# Altium PCB UI_Panel.PcbDoc
Units mil, origin at the board's own origin, x right, y up, seen from the top; angles counter-clockwise.
Board outline 3759 x 3274 mil, 3 copper layers (TopLayer, MidLayer14, BottomLayer); 16 components, 1 nets, 131 pads, 11 vias.
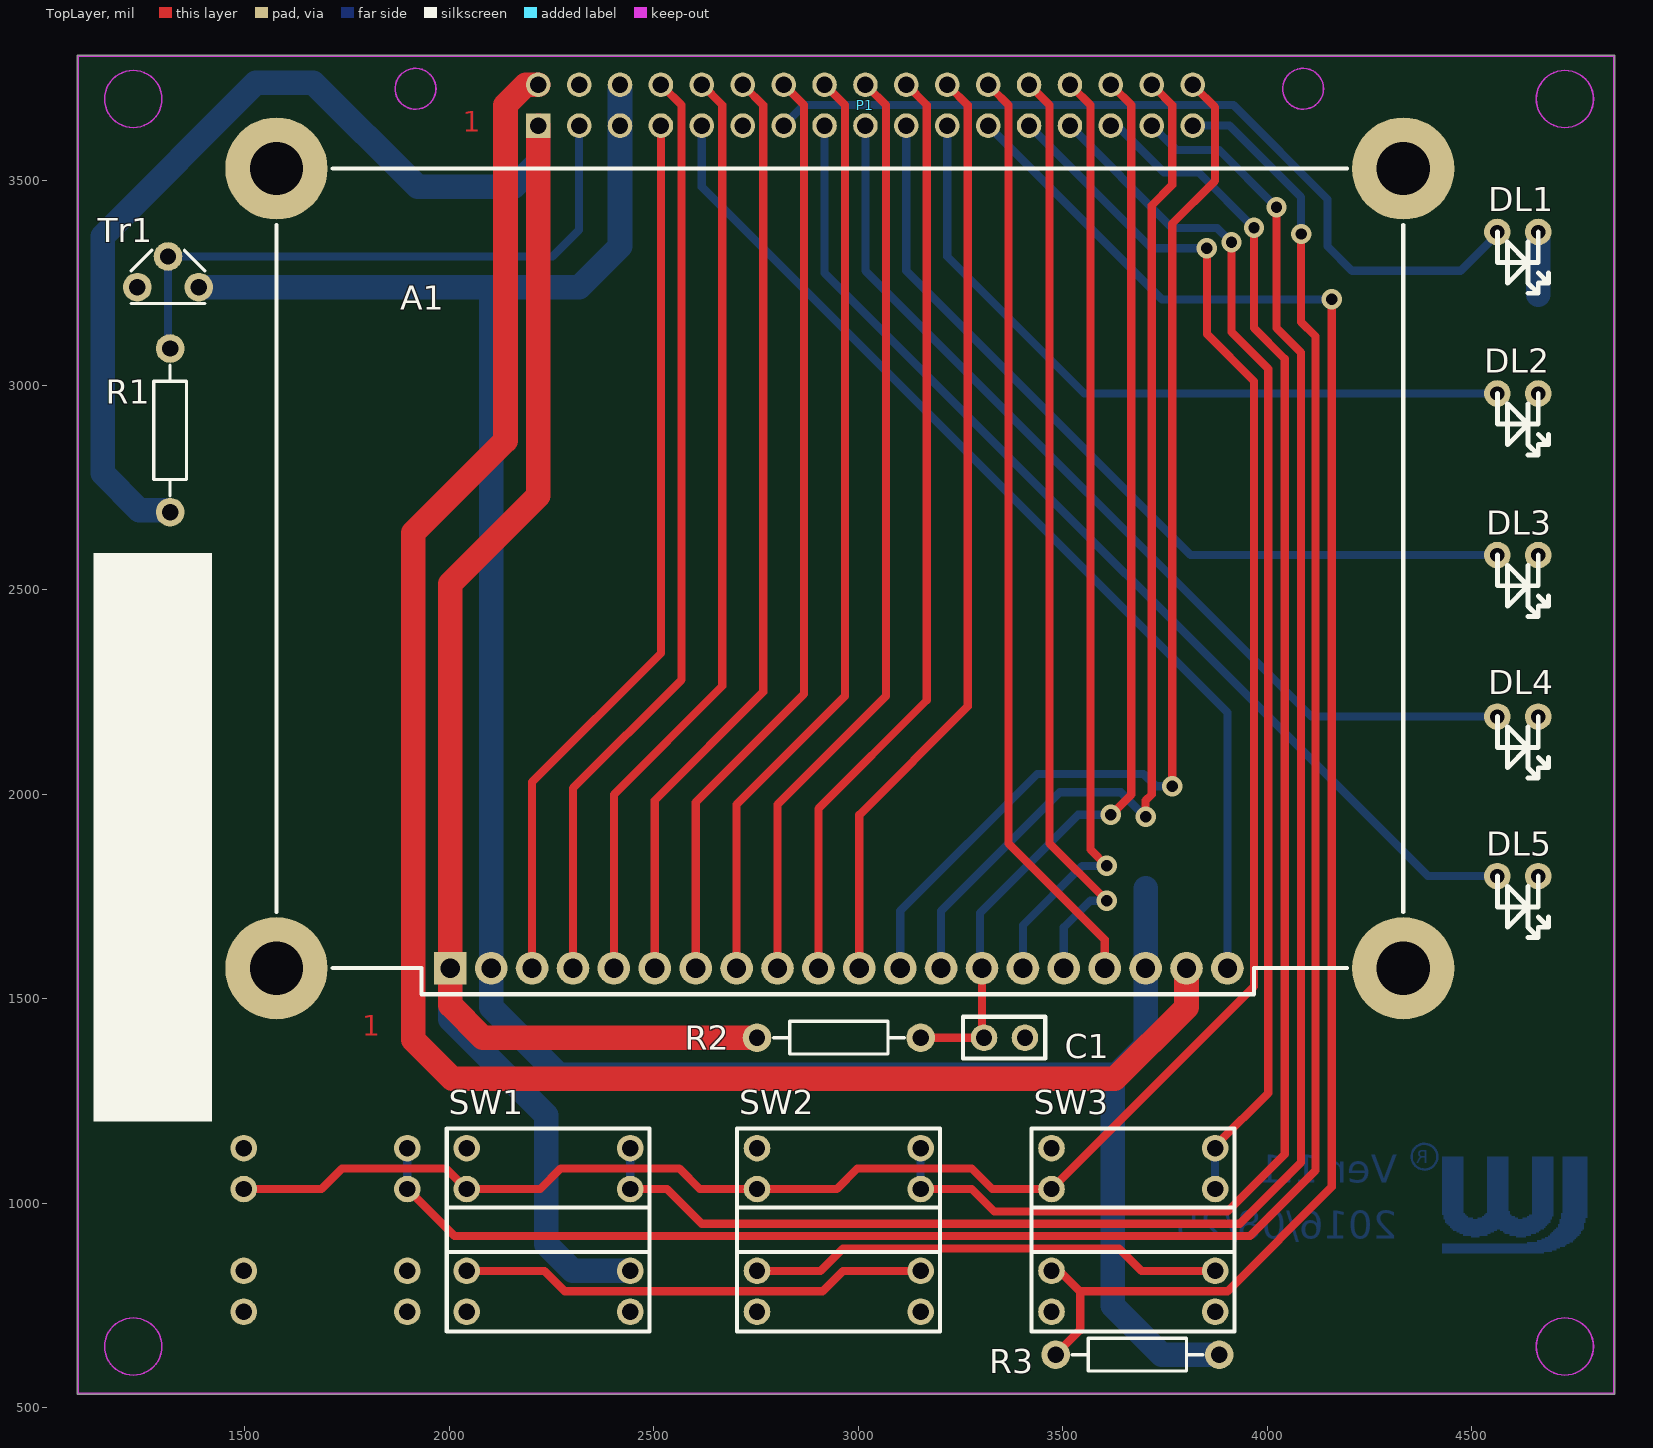
[diagram p0: TopLayer view]
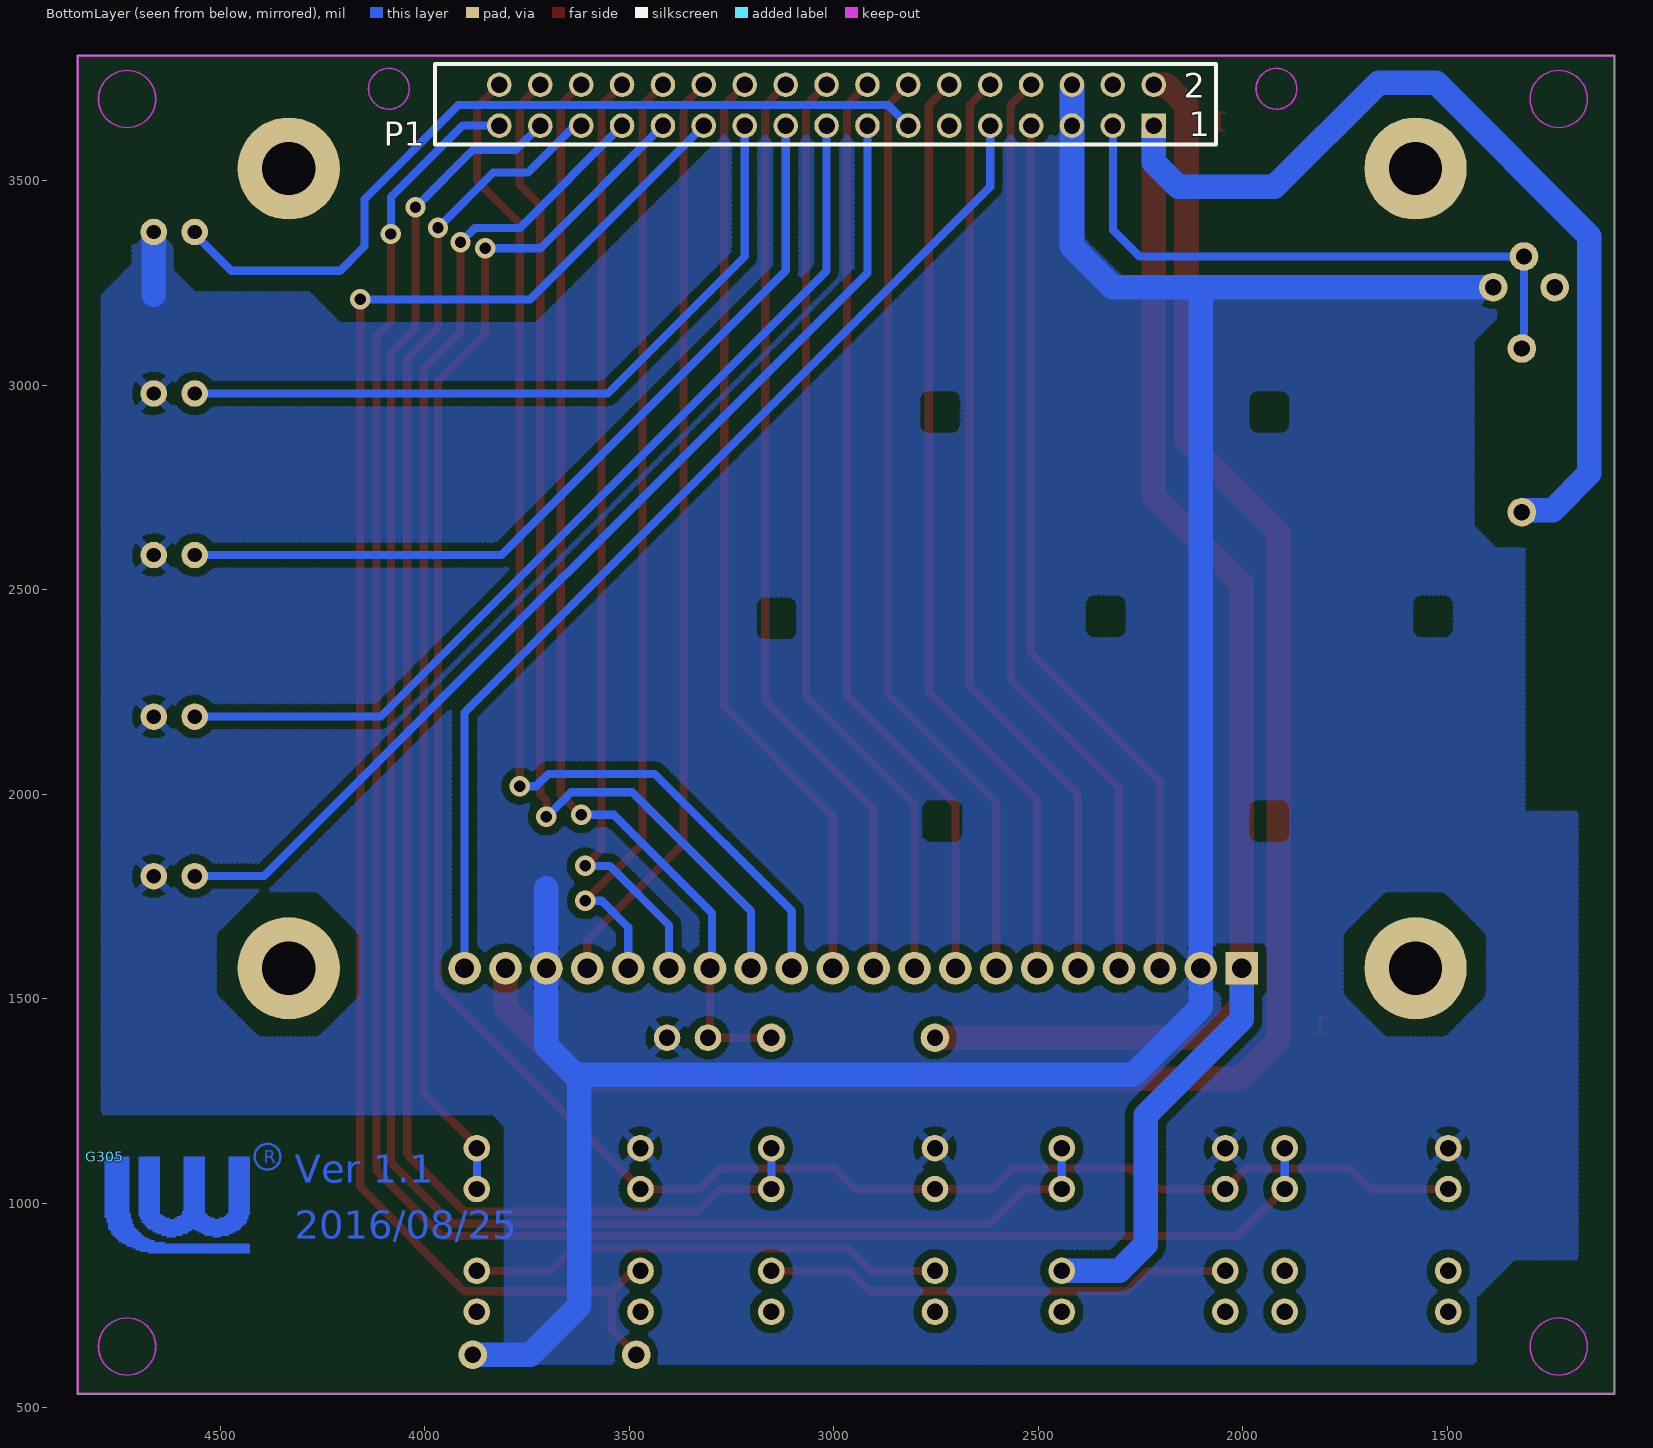
[diagram p1: BottomLayer view, seen from below]
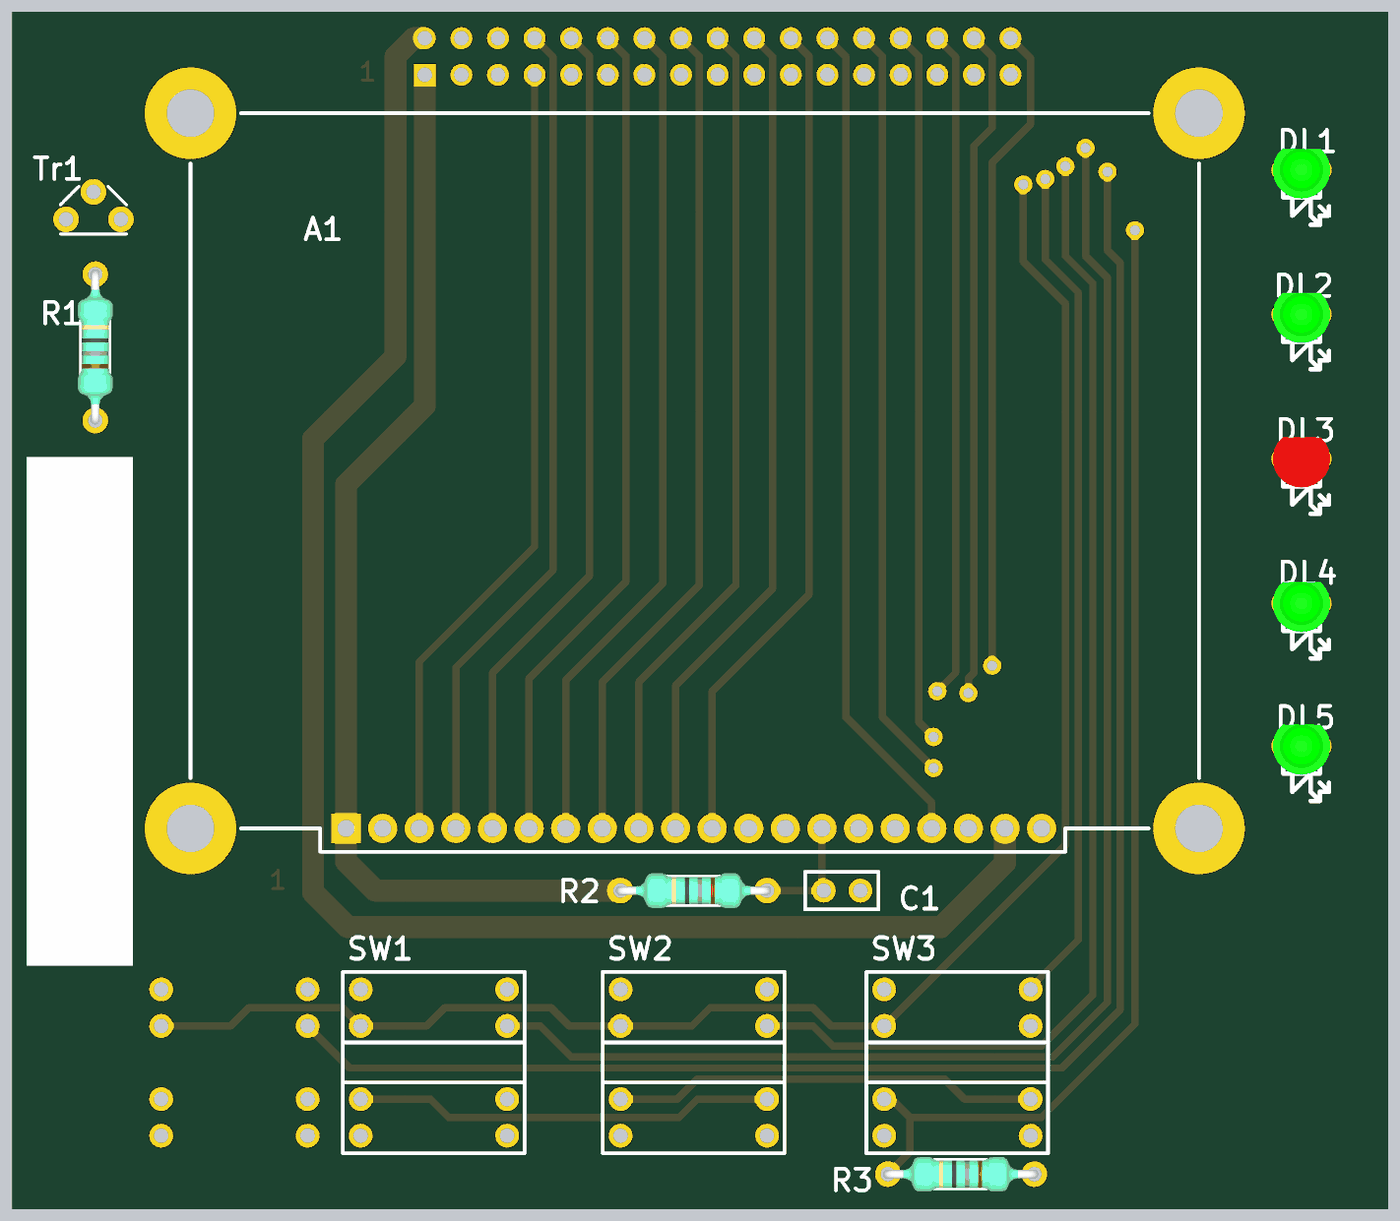
[diagram p2: 3D render of the assembled board from above, using the file's embedded part models]

## Layer stack, top to bottom
TopLayer: signal copper 1.4
Dielectric: dielectric 12.6, FR-4, Dk 4.8
MidLayer14: signal copper 1.4
Dielectric: dielectric 12.6, FR-4, Dk 4.8
BottomLayer: signal copper 1.4

## Board outline
1090.3,532.79 4849.3,532.79 4849.3,3806.79 1090.3,3806.79

## Design rules (kind name [scope] priority, off if disabled: settings)
Clearance [All] p1 off: gap=20
ComponentClearance [All] p1 off: gap=10 collisioncheckmode=3 verticalgap=10 showdistances=FALSE
FabricationTestPointUsage TestPointUsage [All] p1: valid=0 allowmultiple=FALSE
FabricationTestpoint Testpoint [All] p1: side=3 testpointundercomponent=TRUE minsize=40 maxsize=100 preferedsize=60 minholesize=20 maxholesize=40 preferedholesize=32 testpointgrid=1 allowsidetop=TRUE allowsidebottom=TRUE usegrid=TRUE gridtolerance=0.01
PlaneClearance [All] p1: clearance=10
PolygonConnect [All] p1: connectstyle=Relief reliefconductorwidth=20 reliefentries=4 polygonreliefangle="45 Angle" airgapwidth=10
RoutingLayers [All] p1: top layer_v5=TRUE mid layer 14_v5=FALSE bottom layer_v5=TRUE
RoutingPriority [All] p1: routingpriority=2
RoutingVias [All] p1: holewidth=20 width=50 viastyle="Through Hole" minholewidth=28 minwidth=50 maxholewidth=28 maxwidth=50
SolderMaskExpansion [All] p1: expansion=2
Width [All] p1: maxlimit=10 minlimit=10 preferedwidth=10
22 further rules are at their usual default settings.

## Components (designator, comment, footprint, x,y, rotation, side; value= is the part's Value field where it differs from the comment)
A1 "Comment" TPIH2500-LCD 2002.3,1574.79 r0 top
C1 "Comment" RAD0.1 3307.3,1404.79 r0 top
DL1 "Comment" LED_GREEN 4662.3,3374.79 r180 top
DL2 "Comment" LED_GREEN 4662.3,2979.79 r180 top
DL3 "Comment" LED_RED 4662.3,2584.79 r180 top
DL4 "Comment" LED_GREEN 4662.3,2189.79 r180 top
DL5 "Comment" LED_GREEN 4662.3,1799.79 r180 top
G305 "Comment" LW_R-top 4781.61,1113.94 r180 bottom
P1 "Comment" TPIH2500-IDC2.54 2217.3,3634.79 r0 top
R1 "Comment" TPIH2500-RES0.4 1317.3,3089.79 r270 top
R2 "Comment" TPIH2500-RES0.4 2752.3,1404.79 r0 top
R3 "Comment" TPIH2500-RES0.4 3482.3,629.79 r0 top
SW1 "Comment" SW-MEC8 2042.3,1134.79 r0 top
SW2 "Comment" SW-MEC8 2752.3,1134.79 r0 top
SW3 "Comment" SW-MEC8 3472.3,1134.79 r0 top
Tr1 "Comment" TO-92C 1312.3,3314.79 r90 top

## Footprints (in the part's own frame and the unit in brackets; to place one, negate y for a bottom-side part, rotate by r counter-clockwise, add the part's x,y. Pads: shape width x height; smd on the part's side, far side on the other; paste and mask are expansions set on the pad)
LED_GREEN [mil]
  round 65 hole 35: A(100,0) K(0,0)
  silkscreen extent -25,0 100,150, body extent -28,-59 128,79, height 271
LED_RED [mil]
  round 65 hole 35: A(100,0) K(0,0)
  silkscreen extent -25,0 100,150, body extent -28,-59 128,79, height 271
LW_R-top [mil]
  TopLayer circle w5.91: c397.58,0 r31.5
  TopLayer region: 59.06,-3.94 59.05,-7.87 59.05,-19.69 59.06,-23.62 59.05,-27.56 59.05,-39.37 59.06,-43.31 59.05,-47.24 59.05,-59.06 59.06,-62.99 59.05,-66.93 59.05,-78.74 59.06,-82.68 59.05,-86.61 59.05,-98.43 59.06,-102.36 59.05,-106.3 59.05,-133.86 59.06,-137.8 62.99,-137.8 62.99,-141.73 62.99,-153.54 66.93,-153.54 66.93,-165.35 70.87,-165.35 70.87,-173.23 74.8,-173.23 74.8,-177.17 78.74,-177.17 78.74,-181.1 82.68,-181.1 82.68,-185.04 86.61,-185.04 86.61,-188.98 90.55,-188.98 90.55,-192.91 94.49,-192.91 94.49,-196.85 102.36,-196.85 102.36,-200.79 110.24,-200.79 110.24,-204.72 122.05,-204.72 122.05,-208.66 145.67,-208.66 145.67,-212.6 354.33,-212.6 354.33,-220.47 354.33,-224.41 354.33,-228.35 354.33,-236.22 106.3,-236.22 106.3,-232.28 86.61,-232.28 86.61,-228.35 74.8,-228.35 74.8,-224.41 66.93,-224.41 66.93,-220.47 55.12,-220.47 55.12,-216.54 51.18,-216.54 51.18,-212.6 43.31,-212.6 43.31,-208.66 35.43,-208.66 35.43,-204.72 31.5,-204.72 31.5,-200.79 27.56,-200.79 27.56,-196.85 23.62,-196.85 23.62,-192.91 19.68,-192.91 19.68,-188.98 15.75,-188.98 15.75,-181.1 11.81,-181.1 11.81,-177.17 7.87,-177.17 7.87,-161.42 3.94,-161.42 3.94,-149.61 0,-149.61 0,0 59.05,0
  TopLayer region: 167 vertices and 0 holes, not listed, extent 82.68,-196.85 354.33,0
RAD0.1 [mil]
  round 65 hole 40: 1(0,0) 2(100,0)
  silkscreen extent -51,-51 150,51
SW-MEC8 [mil]
  round 65 hole 40: 1(0,0) 2(400,0) 3(0,-100) 4(400,-100) 5(0,-300) 6(400,-300) 7(0,-400) 8(400,-400)
  silkscreen extent -49,-448 448,48
TO-92C [mil]
  round 70 hole 40: 1(-75,75) 2(0,0) 3(-75,-75)
  silkscreen extent -115,-90 15,90
TPIH2500-IDC2.54 [mil]
  rect 60x60 hole 40: 1(0,0)
  round 60 hole 40: 2(0,100) 3(100,0) 4(100,100) 5(200,0) 6(200,100) 7(300,0) 8(300,100) 9(400,0) 10(400,100) 11(500,0) 12(500,100) 13(600,0) 14(600,100) 15(700,0) 16(700,100) 17(800,0) 18(800,100) 19(900,0) 20(900,100) 21(1000,0) 22(1000,100) 23(1100,0) 24(1100,100) 25(1200,0) 26(1200,100) 27(1300,0) 28(1300,100) 29(1400,0) 30(1400,100) 31(1500,0) 32(1500,100) 33(1600,0) 34(1600,100)
TPIH2500-LCD [mil]
  rect 80x80 hole 47: 1(0,0)
  round 80 hole 47: 2(100,0) 3(200,0) 4(300,0) 5(400,0) 6(500,0) 7(600,0) 8(700,0) 9(800,0) 10(900,0) 11(1000,0) 12(1100,0) 13(1200,0) 14(1300,0) 15(1400,0) 16(1500,0) 17(1600,0) 18(1700,0) 19(1800,0) 20(1900,0)
  silkscreen extent -425,-64 2330,1955
TPIH2500-RES0.4 [mil]
  round 70 hole 40: 1(0,0) 2(400,0)
  silkscreen extent 40,-40 360,40, body extent -13,-47 411,47, height 95

## Free pads (board coordinates)
  rect 80x80 hole 47: 1(2002.3,1574.79)
  round 80 hole 47: 35(3602.3,1574.79) 36(3702.3,1574.79) 37(3802.3,1574.79) 38(3902.3,1574.79) 39(3502.3,1574.79) 40(3402.3,1574.79) 41(3302.3,1574.79) 42(3202.3,1574.79) 43(2802.3,1574.79) 44(2902.3,1574.79) 45(3002.3,1574.79) 46(3102.3,1574.79) 47(2702.3,1574.79) 48(2602.3,1574.79) 49(2502.3,1574.79) 50(2402.3,1574.79) 51(2302.3,1574.79) 52(2202.3,1574.79) 53(2102.3,1574.79)
  round 65 hole 40: 90(1897.3,1134.79) 91(1897.3,1034.79) 92(1897.3,834.79) 93(1897.3,734.79) 94(1497.3,1134.79) 95(1497.3,1034.79) 96(1497.3,834.79) 97(1497.3,734.79)
  round 250 hole 130: 108(4332.3,3529.79) 109(4332.3,1574.79) 110(1577.3,3529.79) 111(1577.3,1574.79)

## Via types
v1: diameter 50, hole 28, TopLayer to BottomLayer, 11 vias

## Nets (pads, with @x,y where several pads share a name; then routed paths per layer and width w, separated by ;. In a path a pad name is that pad's centre, name@x,y a point inside that pad or via, vN(x,y) a via of type N, cw(c..) or ccw(c..) an arc to the next point about the centre after c; other vN are vias at no path point)
GND: pad.36 pad.53 pad.94 | length 6306.5
  BottomLayer w60: 1387.3,3239.79 2317.3,3239.79 2417.3,3339.79 2417.3,3729.79 ; 2102.3,3234.79 pad.53 2102.3,1479.79 2267.3,1314.79 3632.3,1314.79 3702.3,1384.79 3702.3,1769.79 ; 3622.3,1304.79 3622.3,749.79 3742.3,629.79 3872.3,629.79 ; 4662.3,3221.76 4662.3,3374.79
pads on no net: A1.1 A1.2 A1.3 A1.4 A1.5 A1.6 A1.7 A1.8 A1.9 A1.10 A1.11 A1.12 A1.13 A1.14 A1.15 A1.16 A1.17 A1.18 A1.19 A1.20 C1.1 C1.2 DL1.A DL1.K DL2.A DL2.K DL3.A DL3.K DL4.A DL4.K DL5.A DL5.K P1.1 P1.2 P1.3 P1.4 P1.5 P1.6 P1.7 P1.8 P1.9 P1.10 P1.11 P1.12 P1.13 P1.14 P1.15 P1.16 P1.17 P1.18 P1.19 P1.20 P1.21 P1.22 P1.23 P1.24 P1.25 P1.26 P1.27 P1.28 P1.29 P1.30 P1.31 P1.32 P1.33 P1.34 R1.1 R1.2 R2.1 R2.2 R3.1 R3.2 SW1.1 SW1.2 SW1.3 SW1.4 SW1.5 SW1.6 SW1.7 SW1.8 SW2.1 SW2.2 SW2.3 SW2.4 SW2.5 SW2.6 SW2.7 SW2.8 SW3.1 SW3.2 SW3.3 SW3.4 SW3.5 SW3.6 SW3.7 SW3.8 Tr1.1 Tr1.2 Tr1.3
copper on no net: | length 89198.1
  TopLayer w20: 1507.3,1034.79 1687.3,1034.79 1737.3,1084.79 1992.3,1084.79 2042.3,1034.79 2222.3,1034.79 2272.3,1084.79 2562.3,1084.79 2612.3,1034.79 2947.3,1034.79 2997.3,1084.79 3277.3,1084.79 3327.3,1034.79 3462.3,1034.79 ; 1897.3,1034.79 2012.3,919.79 3957.3,919.79 4117.3,1079.79 4117.3,3119.79 4082.3,3154.79 v1(4082.3,3369.79) ; 2052.3,834.79 2232.3,834.79 2282.3,784.79 2912.3,784.79 2962.3,834.79 3142.3,834.79 ; 2202.3,1584.79 2202.3,2029.79 2517.3,2344.79 2517.3,3629.79 ; 2302.3,1579.79 2302.3,2014.79 2567.3,2279.79 2567.3,3684.79 2522.3,3729.79 ; 2402.3,1579.79 2402.3,1999.79 2667.3,2264.79 2667.3,3684.79 2617.3,3734.79 ; 2447.3,1034.79 2532.3,1034.79 2617.3,949.79 3932.3,949.79 4082.3,1099.79 4082.3,3079.79 4022.3,3139.79 v1(4022.3,3434.79) ; 2502.3,1574.79 2502.3,1984.79 2767.3,2249.79 2767.3,3684.79 2722.3,3729.79 ; 2602.3,1584.79 2602.3,1979.79 2867.3,2244.79 2867.3,3684.79 2817.3,3734.79 ; 2702.3,1584.79 2702.3,1974.79 2967.3,2239.79 2967.3,3684.79 2917.3,3734.79 ; 2757.3,834.79 2907.3,834.79 2962.3,889.79 3637.3,889.79 3692.3,834.79 3872.3,834.79 ; 2802.3,1574.79 2802.3,1974.79 3067.3,2239.79 3067.3,3684.79 3022.3,3729.79 ; 2902.3,1579.79 2902.3,1964.79 3167.3,2229.79 3167.3,3684.79 3117.3,3734.79 ; 3002.3,1574.79 3002.3,1949.79 3267.3,2214.79 3267.3,3684.79 3222.3,3729.79 ; 3152.3,1404.79 3302.3,1404.79 3302.3,1579.79 ; 3162.3,1034.79 3277.3,1034.79 3332.3,979.79 3902.3,979.79 4042.3,1119.79 4042.3,3064.79 3967.3,3139.79 v1(3967.3,3384.79) ; 3327.3,3724.79 3367.3,3684.79 3367.3,1879.79 3602.3,1644.79 3602.3,1579.79 ; 3417.3,3734.79 3467.3,3684.79 3467.3,1879.79 v1(3607.3,1739.79) ; 3472.3,1034.79 3967.3,1529.79 3967.3,3009.79 3852.3,3124.79 v1(3852.3,3334.79) ; 3482.3,629.79 3542.3,689.79 3542.3,779.79 ; 3487.3,839.79 3542.3,784.79 3902.3,784.79 4157.3,1039.79 v1(4157.3,3209.79) ; 3522.3,3729.79 3567.3,3684.79 3567.3,1864.79 v1(3607.3,1824.79) ; v1(3617.3,1949.79) 3667.3,1999.79 3667.3,3684.79 3622.3,3729.79 ; v1(3702.3,1944.79) 3702.3,1984.79 3717.3,1999.79 3717.3,3439.79 3767.3,3489.79 3767.3,3684.79 3727.3,3724.79 ; v1(3767.3,2019.79) 3767.3,3394.79 3872.3,3499.79 3872.3,3679.79 3822.3,3729.79 ; 3877.3,1144.79 4002.3,1269.79 4002.3,3039.79 3912.3,3129.79 v1(3912.3,3349.79)
  TopLayer w60: 2217.3,3634.79 2217.3,2729.79 2002.3,2514.79 2002.3,1484.79 2082.3,1404.79 2752.3,1404.79 ; 2217.3,3734.79 2187.3,3734.79 2137.3,3684.79 2137.3,2864.79 1912.3,2639.79 1912.3,1399.79 2007.3,1304.79 3627.3,1304.79 3802.3,1479.79 3802.3,1574.79
  BottomLayer w20: 1312.3,3094.79 1312.3,3314.79 2252.3,3314.79 2317.3,3379.79 2317.3,3624.79 ; 1897.3,1039.79 1897.3,1129.79 ; 2442.3,1044.79 2442.3,1134.79 ; 2617.3,3634.79 2617.3,3484.79 3902.3,2199.79 3902.3,1574.79 ; 2817.3,3634.79 2867.3,3684.79 3917.3,3684.79 4147.3,3454.79 4147.3,3339.79 4207.3,3279.79 4472.3,3279.79 4562.3,3369.79 ; 2917.3,3634.79 2917.3,3274.79 4392.3,1799.79 4562.3,1799.79 ; 3017.3,3629.79 3017.3,3279.79 4107.3,2189.79 4567.3,2189.79 ; 3102.3,1574.79 3102.3,1714.79 3437.3,2049.79 3697.3,2049.79 3727.3,2019.79 v1(3767.3,2019.79) ; 3117.3,3639.79 3117.3,3279.79 3812.3,2584.79 4562.3,2584.79 ; 3152.3,1039.79 3152.3,1139.79 ; 3202.3,1569.79 3202.3,1714.79 3492.3,2004.79 3642.3,2004.79 v1(3702.3,1944.79) ; 3217.3,3629.79 3217.3,3314.79 3552.3,2979.79 4562.3,2979.79 ; 3297.3,1579.79 3297.3,1709.79 3537.3,1949.79 v1@3607.3,1949.79 ; 3317.3,3634.79 3742.3,3209.79 v1@4152.3,3209.79 ; 3402.3,1574.79 3402.3,1679.79 3547.3,1824.79 v1(3607.3,1824.79) ; 3417.3,3634.79 3717.3,3334.79 v1@3857.3,3334.79 ; 3502.3,1574.79 3502.3,1674.79 3567.3,1739.79 v1(3607.3,1739.79) ; 3517.3,3634.79 3767.3,3384.79 3877.3,3384.79 v1(3912.3,3349.79) ; 3622.3,3644.79 3747.3,3519.79 3832.3,3519.79 v1(3967.3,3384.79) ; 3717.3,3634.79 3777.3,3574.79 3882.3,3574.79 v1@4017.3,3439.79 ; 3817.3,3634.79 3907.3,3634.79 4082.3,3459.79 v1@4082.3,3364.79 ; 3872.3,1039.79 3872.3,1129.79
  BottomLayer w60: 1312.3,2694.79 1242.3,2694.79 1152.3,2784.79 1152.3,3364.79 1527.3,3739.79 1667.3,3739.79 1922.3,3484.79 2157.3,3484.79 2217.3,3544.79 2217.3,3624.79 ; 2002.3,1569.79 2002.3,1449.79 2237.3,1214.79 2237.3,899.79 2302.3,834.79 2437.3,834.79

## Polygon pours and split planes (outlines as drawn)
GND on BottomLayer "BottomLayer-GND" (hatched 45Degree grid 8 track 10, remove dead copper, pour order 2): 3807.3,609.79 1432.3,609.79 1432.3,769.79 1337.3,864.79 1182.3,864.79 1182.3,1954.79 1312.3,1954.79 1312.3,2599.79 1382.3,2599.79 1437.3,2654.79 1437.3,3109.79 1382.3,3164.79 1382.3,3259.79 2292.3,3259.79 2397.3,3364.79 2397.3,3614.79 3262.3,3614.79 3727.3,3149.79 4207.3,3149.79 4282.3,3224.79 4562.3,3224.79 4617.3,3279.79 4617.3,3349.79 4647.3,3379.79 4687.3,3379.79 4712.3,3354.79 4712.3,3294.79 4787.3,3219.79 4787.3,1219.79 3832.3,1219.79 3802.3,1189.79 3802.3,619.79

## Keep-outs
KeepOutLayer:
  circle w4: c4087.3,3724.79 r50
  circle w4: c1917.3,3724.79 r50
  circle w4: c4727.3,3699.79 r70
  circle w4: c4727.3,649.79 r70
  circle w4: c1227.3,3699.79 r70
  circle w4: c1227.3,649.79 r70
  lines w4: 1092.3,534.79 1092.3,3804.79 4847.3,3804.79 4847.3,534.79 1092.3,534.79

## Other copper
TopLayer:
  text "1" at 2032.3,3619.79 h50
  text "1" at 1787.3,1409.79 h50
BottomLayer:
  text "Ver 1.1" at 4317.05,1027.32 h118.11
  text "2016/08/25" at 4317.05,889.53 h118.11

## Silkscreen, mask and mechanical layers (free items; w line width, h text height)
TopOverlay:
  region: 1420,1200 1420,2590 1130,2590 1130,1200
BottomSolder:
  text "DISPLAY_BOARD_Jeff" at 4750,775 h100
Mechanical1:
  text "技术要求：" at 4908.7,1394.17 h118.11
  text "1) 板材：FR4，板厚：1.6mm，1oz铜厚(成品)；" at 5144.92,1276.06 h118.11
  text "2) 双面，金属孔化，过孔盖油，喷锡；" at 5144.92,1157.95 h118.11
  text "3) 阻焊层颜色：蓝色。丝印白字。" at 5144.92,1039.84 h118.11
  text "4) 安装孔(孔径>焊盘直径的孔)非金属孔化。" at 5144.92,921.73 h118.11
  text "5) 按机械层1尺寸和位置开孔、开槽，锣边。" at 5144.92,805.51 h118.11
  text "6) 飞针测试。" at 5144.92,685.51 h118.11
  text "7) 其他机械层为设计时的辅助线层，制板时全部忽略。" at 5144.92,565.51 h118.11

## Text inside footprints (layer, text, board x,y; h text height)
G305: BottomLayer "R" at 4393.82,1098.19 h31.5
P1: BottomOverlay "1" at 2132.28,3608.27 h60; BottomOverlay "2" at 2144.09,3702.76 h60